# EAGLE board myBusToESP01 (EAGLE 7.3.0)
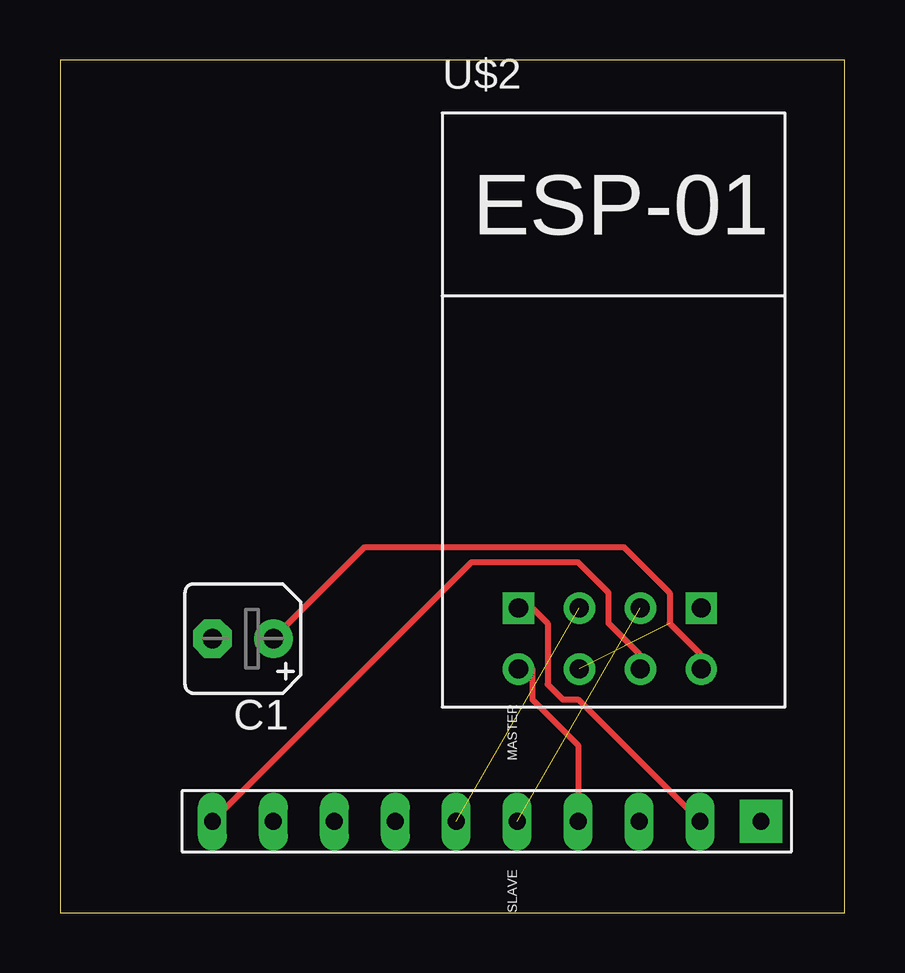
[diagram p0: board, top side]
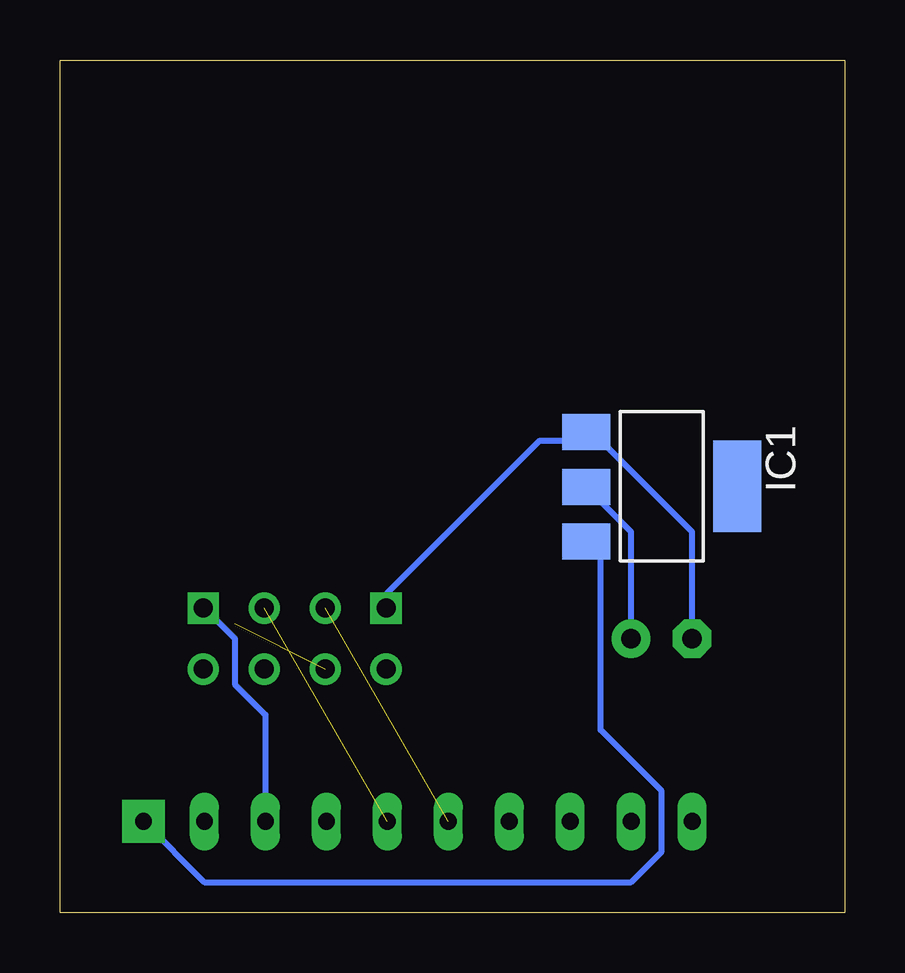
[diagram p1: board, bottom side, seen from below]

Size 32.69 x 35.55 mm. Coordinates in mm from the lower left corner, seen from the top.
Outline: 0,0 32.69,0 32.69,35.55 0,35.55 0,0
Copper layers (1*16): Top 0.035mm / dielectric 1.5mm / Bottom 0.035mm
Design rules "default": minimum track width 10mil, minimum drill 24mil, track to track 8mil, track to pad 8mil, pad to pad 8mil, via to via 8mil, smd to smd 8mil, copper to edge 40mil, drill to drill 8mil, minimum pad ring 10mil, minimum via ring 8mil, stop-mask expansion 4mil, vias tented up to drill 0mil, thermal gap 10mil

## Footprints (pad centres in the part's own frame; a part is rotated, then mirrored left to right if it is on the bottom)
B45181A = drill 0.813 pad 1.6: + -1.27,0 | drill 0.813 pad 1.6 octagon: - 1.27,0
SOT223 = smd 1.499 x 2.007: 1 -2.261,-3.15; 2 0.025,-3.15; 3 2.311,-3.15 | smd 3.81 x 2.007: 4 0,3.15
SPI_BUS = drill 0.7 pad 1.778 square: +5V 0,0 | drill 0.7 long: CS 0,22.86; GND 0,2.54; MISO 0,15.24; MOSI 0,17.78; RXD 0,7.62; SCK 0,20.32; SCL 0,10.16; SDA 0,12.7; TXD 0,5.08
ESP01 = drill 0.8: CH_PD 2.59,0.001; GPIO0 5.13,2.541; GPIO2 2.59,2.541; RST 5.13,0.001; TX 0.05,0.001; VCC 7.67,0.001 | drill 0.8 square: GND 0.05,2.541; RX 7.67,2.541

## Placement (x,y rotation side)
C1  [B45181A]  7.62,11.43 180 top
IC1  REG1117  [SOT223]  7.62,17.78 270 bottom
U$1  SPI_BUS  [SPI_BUS]  29.21,3.81 90 top
U$2  ESP01  [ESP01]  19.05,10.16 0 top

## Library data of the parts
C1 = resistor
IC1 = burr-brown; MPN: REG1117; OC_FARNELL: 1097566; OC_NEWARK: 14P6981
U$1 = lieven
U$2 = esp8266modules

## Nets
N$1: C1.- IC1.1 U$1.GND U$2.GND
N$2: U$1.TXD U$2.RX
N$3: U$1.RXD U$2.TX
N$4: U$1.CS U$2.RST
N$5: U$1.SDA U$2.GPIO2
N$6: U$1.SCL U$2.GPIO0
N$8: IC1.3 U$1.+5V
N$9: C1.+ IC1.2 U$2.CH_PD U$2.VCC

## Tracks (layer width: path | path; a pad name or v marks a point on that pad's centre or on a via)
N$1
  Top 0.254: U$1.GND 21.59,8.89 20.95,8.89 20.32,9.53 20.32,12.06 19.68,12.7 U$2.GND
  Bottom 0.254: C1.- 6.35,15.88 10.16,19.68 IC1.1 10.79,19.68 12.7,19.68 19.05,13.34 U$2.GND
N$2
  Bottom 0.254: U$1.TXD 24.13,8.26 25.4,9.53 25.4,11.43 26.67,12.7 U$2.RX
N$3
  Top 0.254: U$1.RXD 21.59,6.99 19.68,8.89 19.68,10.16 U$2.TX
N$4
  Top 0.254: U$1.CS 17.14,14.61 21.59,14.61 22.86,13.34 22.86,12.06 24.13,10.79 U$2.RST
N$5  (1 unrouted)
N$6  (1 unrouted)
N$8
  Bottom 0.254: U$1.+5V 26.67,1.27 8.89,1.27 7.62,2.54 7.62,5.08 10.16,7.62 10.16,15.24 IC1.3
N$9  (1 unrouted)
  Top 0.254: C1.+ 12.7,15.24 23.5,15.24 25.4,13.34 25.4,12.06 26.67,10.79 U$2.VCC
  Bottom 0.254: IC1.2 8.89,15.88 C1.+